# Altium PCB LED SEQUENCES.PcbDoc
Units mm, origin at the board's own origin, x right, y up, seen from the top; angles counter-clockwise.
Board outline 72.9 x 23.93 mm, 2 copper layers (Top Layer, Bottom Layer), stack 1.671 mm thick; 28 components, 26 nets, 77 pads, 21 vias.
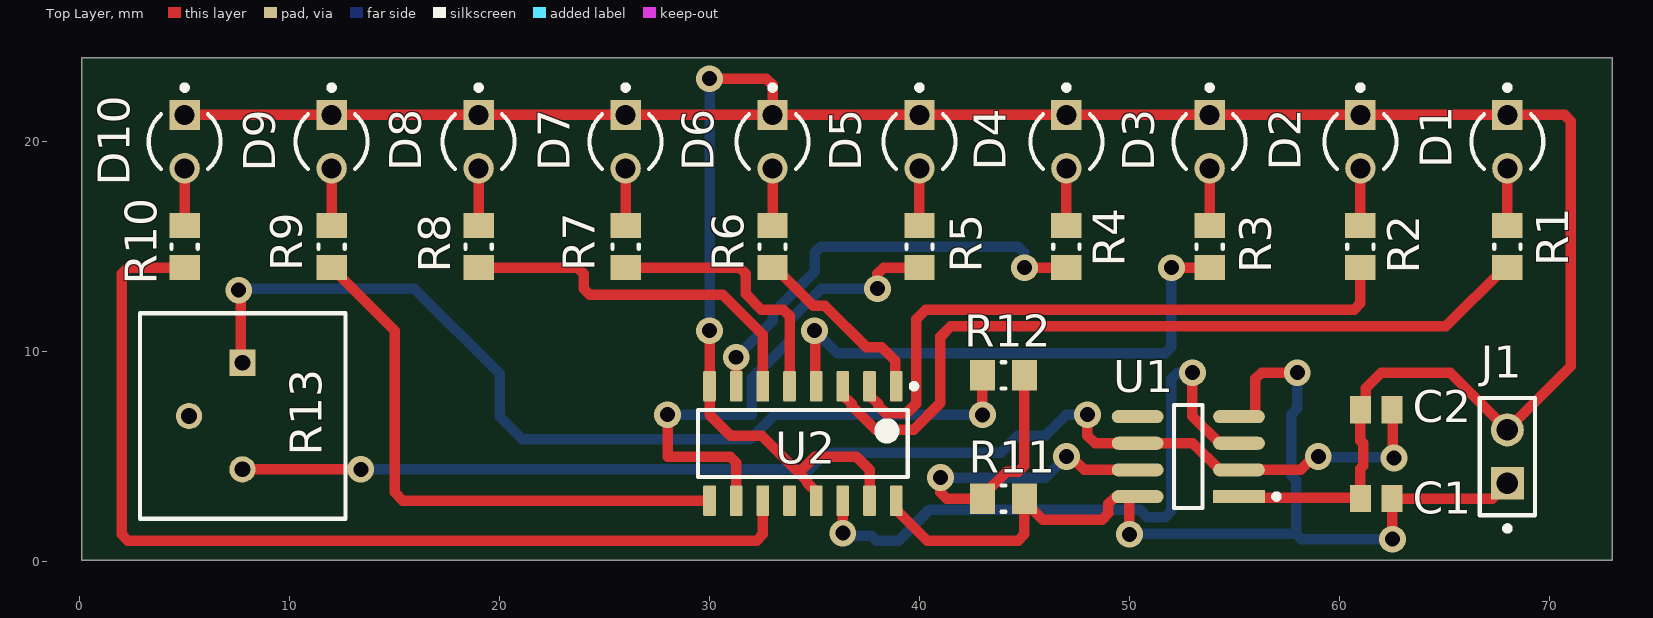
[diagram p0: Top Layer view]
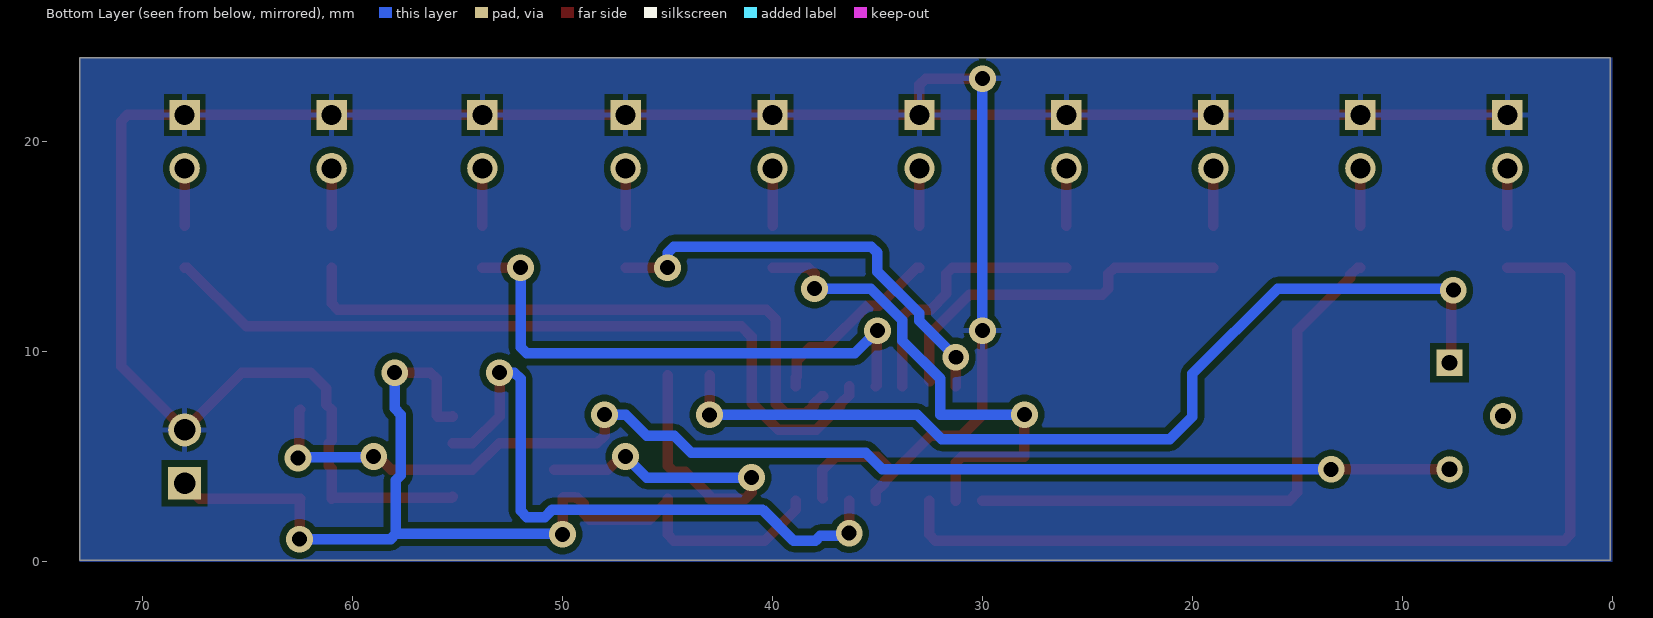
[diagram p1: Bottom Layer view, seen from below]
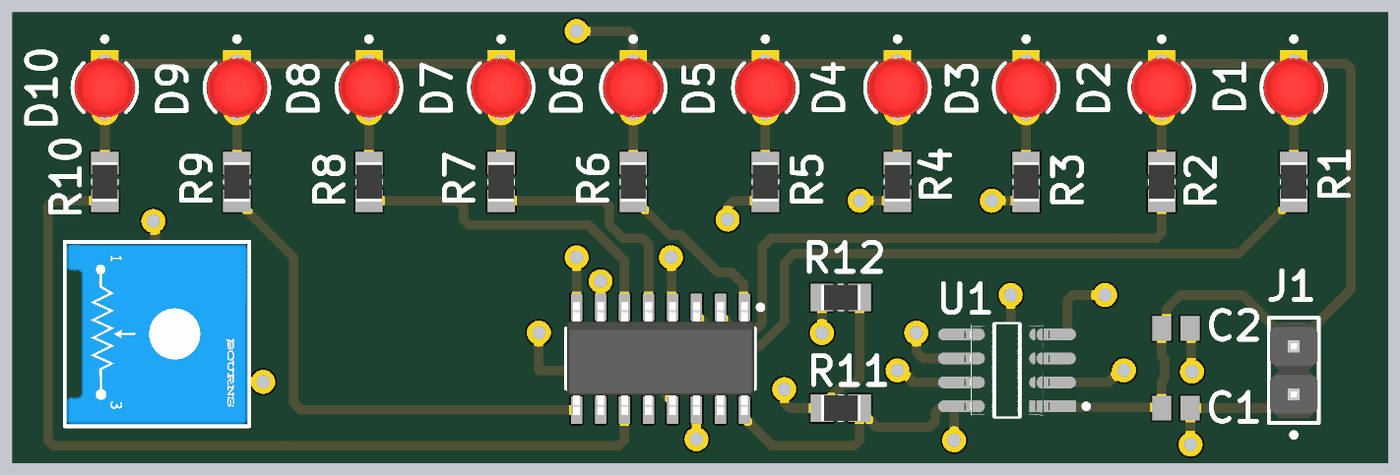
[diagram p2: 3D render of the assembled board from above, using the file's embedded part models]

## Layer stack, top to bottom
Top Solder: solder mask 0.0102, Solder Resist, Dk 3.5
Top Layer: signal copper 0.0356
Dielectric 1: dielectric 1.6, FR-4, Dk 4.8
Bottom Layer: signal copper 0.0356
Bottom Solder: solder mask 0.0102, Solder Resist, Dk 3.5

## Board outline
0.1,0.073 73,0.073 73,24 0.1,24

## Design rules (kind name [scope] priority, off if disabled: settings)
Clearance [All] p1: gap=0.3 ignorepadtopadclearanceinfootprint=FALSE
PolygonConnect [All] p1: connectstyle=Relief reliefconductorwidth=0.254 reliefentries=4 polygonreliefangle="90 Angle" airgapwidth=0.254
RoutingVias [All] p1: holewidth=0.3 width=0.6 viastyle="Through Hole" minholewidth=0.3 minwidth=0.6 maxholewidth=0.3 maxwidth=0.6
SilkToSolderMaskClearance [IsPad] p1: minsilkscreentomaskgap=0.1 clearancetoexposedcopper=TRUE
SolderMaskExpansion [All] p1: expansion=0.102 istentingtop=FALSE
UnRoutedNet [All] p1: checkbadconnections=TRUE
Width [All] p1: maxlimit=1 minlimit=0.3 preferedwidth=0.5
28 further rules are at their usual default settings.

## Components (designator, comment, footprint, x,y, rotation, side; value= is the part's Value field where it differs from the comment)
C1 "GRM21BR71H105KA12L" CAPC2013X135X45LL10T25 61.75,3 r0 top
C2 "GRM21BR71H105KA12L" CAPC2013X135X45LL10T25 61.75,7.227 r0 top
D1 "HLMP-1301" FP-HLMP-1301-MFG 68,20 r270 top
D2 "HLMP-1301" FP-HLMP-1301-MFG 61,20 r270 top
D3 "HLMP-1301" FP-HLMP-1301-MFG 53.818,20 r270 top
D4 "HLMP-1301" FP-HLMP-1301-MFG 47,20 r270 top
D5 "HLMP-1301" FP-HLMP-1301-MFG 40,20 r270 top
D6 "HLMP-1301" FP-HLMP-1301-MFG 33,20 r270 top
D7 "HLMP-1301" FP-HLMP-1301-MFG 26,20 r270 top
D8 "HLMP-1301" FP-HLMP-1301-MFG 19,20 r270 top
D9 "HLMP-1301" FP-HLMP-1301-MFG 12,20 r270 top
D10 "HLMP-1301" FP-HLMP-1301-MFG 5,20 r270 top
J1 "M20-9990246" FP-M20-9990246-MFG 68,5 r90 top
R1 "RC0805FR-071KL" RESC2013X60X35ML10T20 68,15 r90 top
R2 "RC0805FR-071KL" RESC2013X60X35ML10T20 61,15 r90 top
R3 "RC0805FR-071KL" RESC2013X60X35ML10T20 53.818,15 r90 top
R4 "RC0805FR-071KL" RESC2013X60X35ML10T20 47,15 r90 top
R5 "RC0805FR-071KL" RESC2013X60X35ML10T20 40,15 r90 top
R6 "RC0805FR-071KL" RESC2013X60X35ML10T20 33,15 r90 top
R7 "RC0805FR-071KL" RESC2013X60X35ML10T20 26,15 r90 top
R8 "RC0805FR-071KL" RESC2013X60X35ML10T20 19,15 r90 top
R9 "RC0805FR-071KL" RESC2013X60X35ML10T20 12,15 r90 top
R10 "RC0805FR-071KL" RESC2013X60X35ML10T20 5,15 r90 top
R11 "RC0805FR-071KL" RESC2013X60X35ML10T20 44,3 r0 top
R12 "RC0805FR-071KL" RESC2013X60X35ML10T20 44,8.867 r0 top
R13 "3386P-1-104LF" FP-3386P-MFG 7.767,6.932 r270 top
U1 "NE555DR" FP-D0008A-IPC_A 52.805,5 r180 top
U2 "CD4017BM" D0016A_N 34.445,5.624 r270 top

## Footprints (in the part's own frame and the unit in brackets; to place one, negate y for a bottom-side part, rotate by r counter-clockwise, add the part's x,y. Pads: shape width x height; smd on the part's side, far side on the other; paste and mask are expansions set on the pad)
CAPC2013X135X45LL10T25 [mm] "Chip Capacitor, 2-Leads, Body 2.00x1.25mm, IPC High Density"
  rect 1x1.3 smd: 1(-0.75,0) 2(0.75,0)
  body extent -1.05,-0.67 1.05,0.68, height 1.35
D0016A_N [mm] "SOIC, 16-Leads, Body 10x4mm, Pitch 1.27mm, IPC Medium Density"
  rrect17% 1.45x0.6 smd: 1(-2.725,4.445) 2(-2.725,3.175) 3(-2.725,1.905) 4(-2.725,0.635) 5(-2.725,-0.635) 6(-2.725,-1.905) 7(-2.725,-3.175) 8(-2.725,-4.445) 9(2.725,-4.445) 10(2.725,-3.175) 11(2.725,-1.905) 12(2.725,-0.635) 13(2.725,0.635) 14(2.725,1.905) 15(2.725,3.175) 16(2.725,4.445)
  silkscreen extent -2.85,-5 1.6,5.42, body extent -3,-4.95 3,4.95, height 1.59
FP-3386P-MFG [mm]
  rect 1.25x1.25 hole 0.75 paste-1000 mask+0: 1(-2.54,-0.015)
  round 1.25 hole 0.75 paste-1000 mask+0: 2(0,-2.555) 3(2.54,-0.015)
  silkscreen extent -4.89,-4.89 4.89,4.89, body extent -4.99,-4.99 4.99,4.99, height 0.25
FP-D0008A-IPC_A [mm]
  rect 2.469x0.622 smd paste+0 mask+0: 1(-2.414,1.905)
  rrect100% 2.469x0.622 smd paste+0 mask+0: 2(-2.414,0.635) 3(-2.414,-0.635) 4(-2.414,-1.905) 5(2.414,-1.905) 6(2.414,-0.635) 7(2.414,0.635) 8(2.414,1.905)
  silkscreen extent -4.32,-2.45 0.68,2.45, body extent -4.15,-2.95 4.15,2.95, height 0.25
FP-HLMP-1301-MFG [mm]
  rect 1.45x1.45 hole 0.95 paste-1000 mask+0: 1(-1.27,0)
  round 1.45 hole 0.95 paste-1000 mask+0: 2(1.27,0)
  silkscreen extent -2.7,-1.71 1.3,1.71, body extent -2.22,-2.22 2.22,2.22, height 0.25
FP-M20-9990246-MFG [mm]
  rect 1.57x1.57 hole 1.02 paste-1000 mask+0: 1(-1.27,0)
  round 1.57 hole 1.02 paste-1000 mask+0: 2(1.27,0)
  silkscreen extent -3.55,-1.32 2.79,1.32, body extent -2.89,-1.42 2.89,1.42, height 0.25
RESC2013X60X35ML10T20 [mm] "Chip Resistor, 2-Leads, Body 2.1x1.35mm, IPC Low Density"
  rect 1.2x1.45 smd: 1(-1,0) 2(1,0)
  silkscreen extent -0.1,-0.63 0.1,0.63, body extent -1.05,-0.68 1.05,0.67, height 0.6

## Part data
C1 C2: library part CMP-1036-04761-2, Manufacturer=Murata, Part Number=GRM21BR71H105KA12L
D1 D2 D3 D4 D5 D6 D7 D8 D9 D10: library part CMP-18399-000007-1, "LED RED DIFFUSED T-1 T/H", Colour=Red, Forward Current=10mA, Forward Voltage=1.9V, Manufacturer=Broadcom, Max Junction Temp=+110°C, Package=0, Reverse Voltage=5V, Temperature="-40°C to +100°C", Temperature Range High=+100°C, Temperature Range Low=-40°C, Automotive=No, Category=Diode, ComponentLink2Description=Datasheet, ComponentLink2URL=https://docs.broadcom.com/docs/AV02-1555EN, Device Class L1=Optoelectronics, Device Class L2=LEDs, Device Class L3=unset, Digikey Description="LED RED DIFFUSED T-1 T/H", Lead Free=Yes, Led Orientation=Straight, Luminous Intensity=3.4mcd, Manufacturer Part Number=HLMP-1301, Mouser Description="Standard LEDs - Through Hole Red Diffused 635nm 3.4mcd", Octopart=https://octopart.com/hlmp-1301-broadcom-71130345, Peak Emmision Wavelength=635nm, RoHS=TRUE, Viewing Angle=60°, Wavelength=626nm
J1: library part CMP-15831-000009-1, "CONN HEADER VERT 2POS 2.54MM", Current Rating=3A, Manufacturer=Harwin, Temperature="-40°C to +105°C", Temperature Range High=+105°C, Temperature Range Low=-40°C, Automotive=No, Category=Conn, ComponentLink2Description=Datasheet, ComponentLink2URL=https://cdn.harwin.com/pdfs/M20-999.pdf, Conn Gender=Male, Conn Orientation=Vertical, Contact Material=Tin,Nickel, Device Class L1=Connectors, Device Class L2="Headers and Wire Housings", Device Class L3=unset, Digikey Description="CONN HEADER VERT 2POS 2.54MM", Height=8.99mm, Lead Free=Yes, Manufacturer Part Number=M20-9990246, Mouser Description="2.54mm (0.1\") Pitch SIL Vertical PC Tail Pin Header, 6.1mm mating pin height, tin, 2 contacts", Number Of Contacts=2, Number Of Rows=1, Octopart=https://octopart.com/m20-9990246-harwin-2590635, Package=M20-9990246, Pitch=2.54mm, RoHS=TRUE
R1 R2 R3 R4 R5 R6 R7 R8 R9 R10 R11 R12: library part CMP-2100-03671-1, "Chip Resistor, 1 KOhm, +/- 1%, 125 mW, -55 to 155 degC, 0805 (2012 Metric), RoHS, Tape and Reel", Case Code (Imperial)=0805, Case Code (Metric)=2012, Manufacturer=Yageo, Max Operating Temperature=155degC, Max Power Dissipation=125mW, Min Operating Temperature=-55degC, Package Description="2-Pin Surface Mounted Device, Body 2 x 1.25 mm", Package Quantity=1, Resistance=1KOhm, Temperature Coefficient=100ppm/degreesC, Tolerance=1%, Voltage Rating=150V, Case/Package=0805, Composition=ThickFilm, Datasheet URL=http://www.yageo.com/NewPortal/yageodocoutput?fileName=/pdf/R-Chip/PYu-RC_Group_51_RoHS_L_5.pdf, Datasheet Version="Rev. 5, 10/2016", Depth=1.25mm, Height=0.024inch, Lead Free=LeadFree, Length=0.079inch, Manufacturer URL=http://www.yageo.com/, Military Standard=Not, Number of Pins=2, Number of Terminations=2, Package Reference=0805, Packaging=TapeandReel, Power Rating=125mW, REACH SVHC=Unknown, RoHSCompliant=true, Termination=SMD/SMT, Voltage Rating (DC)=150V, Width=0.049inch
R13: library part CMP-2000-05592-8, "TRIMMER 100K OHM 0.5W PC PIN TOP", Color=Blue, Manufacturer Series=3386, Max Operating Temperature=125°C, Max Power Dissipation=500mW, Min Operating Temperature=-55°C, Package Quantity=100, Resistance=100kR, Resistance Law=Linear, Resistance Tolerance=10%, Resistor Type=Cermet, Temperature Coefficient=100ppm/°C, Voltage Rating=300V, Actuator Orientation=Vertical, Actuator Type=SCREW, Contact Plating=Tin, Depth=9.53mm, Height=4.83mm, Lead Free="Contains Lead", Length=9.53mm, Military Standard=Not, Mount="Through Hole", Number of Pins=3, Number of Terminals/Pins=3, Number of Turns=1, Packaging=Rail/Tube, Power Rating=500mW, Radiation Hardening=No, Reach SVHC Compliant=Yes, RoHS Compliant=Yes, Series="Trimpot® 3386 - Sealed", Taper=Linear, Technology=CERMET, Terminal Finish=Tin, Termination=Pin, Tolerance=10%, Type=Potentiometer, Weight=0.03oz, Width=9.53mm
U1: library part CMP-1685-00007-2, "IC OSC SGL TIMER 100KHZ 8-SOIC", Case/Package=SOIC, Frequency=100kHz, High Level Output Current=-200mA, Low Level Output Current=200mA, Max Operating Temperature=70°C, Max Supply Voltage=16V, Min Operating Temperature=0°C, Min Supply Voltage=4.5V, Operating Supply Current=10mA, Package Quantity=2500, Quiescent Current=15mA, Contact Plating=Gold, Height=1.58mm, Lead Free="Lead Free", Length=4.9mm, Mount="Surface Mount", Number of Pins=8, Number of Timers/Counters=1, Packaging="Tape and Reel", Radiation Hardening=No, REACH SVHC="No SVHC", Weight=0.002561oz, Width=3.91mm
U2: library part CMP-1623-00071-2, "CMOS Decade Counter with 10 Decoded Outputs, D0016A, TUBE", F @ Nom Voltage(Max)(Mhz)=8, Generic Part Number=CD4017B, ICC @ Nom Voltage(Max)(mA)=0.03, Manufacturer="Texas Instruments", Operating Temperature Range(C)="-55 to 125", Rating=Military, tpd @ Nom Voltage(Max)(ns)=270, Voltage(Nom)(V)=10, Bits(#)=10, Code_JEDEC="MS-012 variation AC", DatasheetVersion=SCHS027C, Function=Counter, Input Type=CMOS, Inputs=1, Output Drive (IOL/IOH)(Max)(mA)=1.5/-1.5, Output Type=CMOS, PackageReference=D0016A, Schmitt Trigger=No, Technology Family=CD4000, Type=Decade, VCC(Max)(V)=18, VCC(Min)(V)=3

## Via types
v1: diameter 1.27, hole 0.711, Top Layer to Bottom Layer, 21 vias

## Nets (pads, with @x,y where several pads share a name; then routed paths per layer and width w, separated by ;. In a path a pad name is that pad's centre, name@x,y a point inside that pad or via, vN(x,y) a via of type N, cw(c..) or ccw(c..) an arc to the next point about the centre after c; other vN are vias at no path point)
GND: C1.1 C2.1 D1.1 D2.1 D3.1 D4.1 D5.1 D6.1 D7.1 D8.1 D9.1 D10.1 J1.2 U1.1 U2.8 U2.13 U2.15 | length 134.5
  Top Layer w0.5: D10.1 D9.1 D8.1 D7.1 D6.1 ; v1(30,11) U2.8 30,7 31,6 32.482,6 34.249,4.233 ; v1(30,23) 32.707,23 33,22.707 D6.1 ; U2.13 35.08,3.324 34.661,3.743 34.661,3.821 34.249,4.233 ; U2.15@37.608,3.026 37.62,3.039 37.62,4.38 37,5 35.017,5 34.249,4.233 ; U1.1 55.266,3.047 60.953,3.047 C1.1 61,4.42 61.14,4.56 61.14,5.624 61,5.764 C2.1 61.25,7.478 61.25,8.25 62,9 65.27,9 J1.2 71.026,9.296 71.026,20.977 70.733,21.27 D1.1 D2.1 D3.1 D4.1 D5.1 D6.1
  Bottom Layer w0.5: v1(30,11) v1(30,23)
NetC2_2: C2.2 R13.3 U1.2 U1.6 | length 60.2
  Top Layer w0.5: R13.3 v1(13.392,4.392) ; v1(48,7) 48,6 48.365,5.635 U1.6 53.025,5.635 54.295,4.365 58.157,4.365 58.792,5 v1(59,5) ; C2.2 62.552,7.176 62.552,4.987 v1(62.603,4.936)
  Bottom Layer w0.5: v1(13.392,4.392) 34.767,4.392 35.559,5.185 43.864,5.185 44.679,6 46,6 47,7 v1(48,7) ; v1(59,5) 59.032,4.968 62.571,4.968 v1(62.603,4.936)
NetD1_2: D1.2 R1.2 | length 2.7
  Top Layer w0.5: R1.2 D1.2
NetD2_2: D2.2 R2.2 | length 2.7
  Top Layer w0.5: R2.2 D2.2
NetD3_2: D3.2 R3.2 | length 2.7
  Top Layer w0.5: R3.2 D3.2
NetD4_2: D4.2 R4.2 | length 2.7
  Top Layer w0.5: R4.2 D4.2
NetD5_2: D5.2 R5.2 | length 2.7
  Top Layer w0.5: R5.2 D5.2
NetD6_2: D6.2 R6.2 | length 2.7
  Top Layer w0.5: R6.2 D6.2
NetD7_2: D7.2 R7.2 | length 2.7
  Top Layer w0.5: R7.2 D7.2
NetD8_2: D8.2 R8.2 | length 2.7
  Top Layer w0.5: R8.2 D8.2
NetD9_2: D9.2 R9.2 | length 2.7
  Top Layer w0.5: R9.2 D9.2
NetD10_2: D10.2 R10.2 | length 2.7
  Top Layer w0.5: R10.2 D10.2
NetR1_1: R1.1 U2.3 | length 37.9
  Top Layer w0.5: U2.3 36.35,7.924 36.768,7.506 36.768,7.428 37.922,6.274 39.719,6.274 41,7.555 41,10.707 41.493,11.2 65.075,11.2 67.875,14 R1.1
NetR2_1: R2.1 U2.2 | length 30
  Top Layer w0.5: U2.2@37.584,7.882 37.662,7.882 38.038,7.506 38.038,7.428 38.392,7.074 39.388,7.074 39.84,7.527 39.84,11.547 40.293,12 60.707,12 61,12.293 R2.1
NetR3_1: R3.1 U2.4 | length 25.9
  Top Layer w0.5: v1(35,11) 35.04,10.96 35.04,8.389 U2.4 ; v1(52,14) R3.1
  Bottom Layer w0.5: v1(35,11) 36.08,9.92 51.707,9.92 52,10.213 v1(52,14)
NetR4_1: R4.1 U2.7 | length 20.9
  Top Layer w0.5: U2.7 v1(31.27,9.73) ; v1(45,14) R4.1
  Bottom Layer w0.5: v1(31.27,9.73) 33.015,11.475 33.015,11.822 35,13.807 35,14.707 35.293,15 44.707,15 45,14.707 v1(45,14)
NetR5_1: R5.1 U2.10 | length 24.1
  Top Layer w0.5: v1(28,7) 28,5 30.977,5 31.27,4.707 U2.10 ; v1(38,13) 38,13.707 38.293,14 R5.1
  Bottom Layer w0.5: v1(28,7) 32,7 32,8.707 33.815,10.522 33.815,11.491 35.324,13 v1(38,13)
NetR6_1: R6.1 U2.1 | length 8.9
  Top Layer w0.5: R6.1 33.125,14 34.94,12.185 35.491,12.185 37.477,10.199 38.208,10.199 38.84,9.567 38.84,8.824 38.89,8.774 U2.1
NetR7_1: R7.1 U2.5 | length 12.7
  Top Layer w0.5: R7.1 31.432,14 31.725,13.707 31.725,12.746 32.471,12 33.517,12 33.81,11.707 U2.5
NetR8_1: R8.1 U2.6 | length 17.5
  Top Layer w0.5: R8.1 23.707,14 24,13.707 24,13 24.293,12.707 30.632,12.707 32.54,10.799 32.54,8.619 U2.6@32.519,8.598
NetR9_1: R9.1 U2.9 | length 27.2
  Top Layer w0.5: R9.1 12.125,14 12.475,13.65 12.475,13.525 15,11 15,3.293 15.394,2.899 U2.9
NetR10_1: R10.1 U2.11 | length 47.9
  Top Layer w0.5: R10.1 2.293,14 2,13.707 2,1.293 2.293,1 32.247,1 32.54,1.293 U2.11
NetR11_1: R11.1 R12.2 U1.7 | length 19.9
  Top Layer w0.5: v1(41,4) 41,3.293 41.293,3 R11.1 43,3.125 44.15,4.275 44.707,4.275 45,4.568 R12.2 ; v1(47,5) 47.208,5 47.843,4.365 U1.7
  Bottom Layer w0.5: v1(41,4) 46,4 v1(47,5)
NetR12_1: R12.1 R13.1 | length 45.5
  Top Layer w0.5: v1(7.574,12.925) 7.663,12.836 7.663,9.561 R13.1 ; v1(43,6.985) R12.1
  Bottom Layer w0.5: v1(7.574,12.925) 7.649,13 15.945,13 20,8.945 20,6.893 21.078,5.815 31.946,5.815 33.116,6.985 v1(43,6.985)
NetU1_3: U1.3 U2.14 | length 30.5
  Top Layer w0.5: v1(36.35,1.35) U2.14 ; v1(53,9) 53,6.93 54.295,5.635 U1.3
  Bottom Layer w0.5: v1(36.35,1.35) 36.481,1.219 37.735,1.219 37.954,1 39,1 40.478,2.478 50.491,2.478 50.851,2.118 51.707,2.118 52,2.411 52,8.707 52.293,9 v1(53,9)
VCC: C1.2 J1.1 R11.2 U1.4 U1.8 U2.16 | length 49.9
  Top Layer w0.5: U2.16 38.89,2.474 40.364,1 44.707,1 45,1.293 R11.2 45,2.875 45.875,2 48.707,2 49,2.293 49,2.746 49.293,3.039 49.379,3.039 49.412,3.072 49.967,3.072 50,3.039 v1(50,1.293) ; U1.4@55.242,6.928 U1.4 55.944,6.905 56,6.961 56,8.707 56.293,9 v1(58,9) ; v1(62.527,1.068) 62.514,1.082 62.514,2.986 C1.2 67.27,3 J1.1
  Bottom Layer w0.5: v1(50,1.293) 50.025,1.318 57.944,1.318 ; v1(58,9) 58,7.293 57.707,7 57.707,4.11 57.944,3.873 57.944,1.318 ; v1(62.527,1.068) 58.194,1.068 57.944,1.318
pads on no net: R13.2 U1.5 U2.12

## Polygon pours and split planes (outlines as drawn)
GND on Bottom Layer "GND_L02_P000" (solid, remove dead copper, pour order 0): 0,0 73,0 73,24 0,24